# EAGLE board ATTiny84-RFM95W-BME280-panels-2020-03-05 (EAGLE 9.5.2)
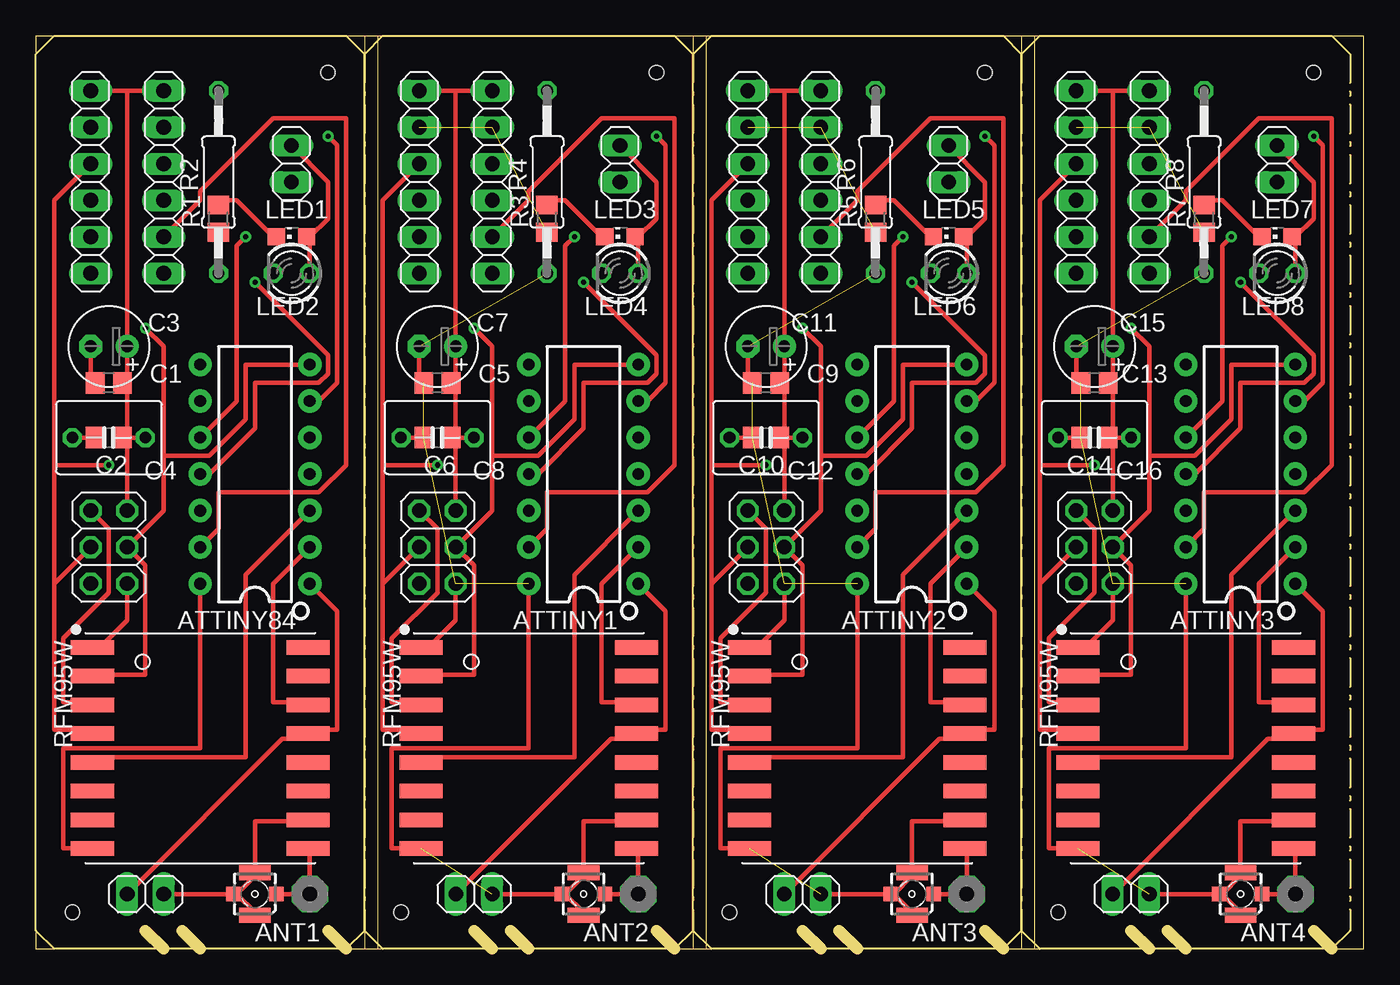
[diagram p0: board, top side]
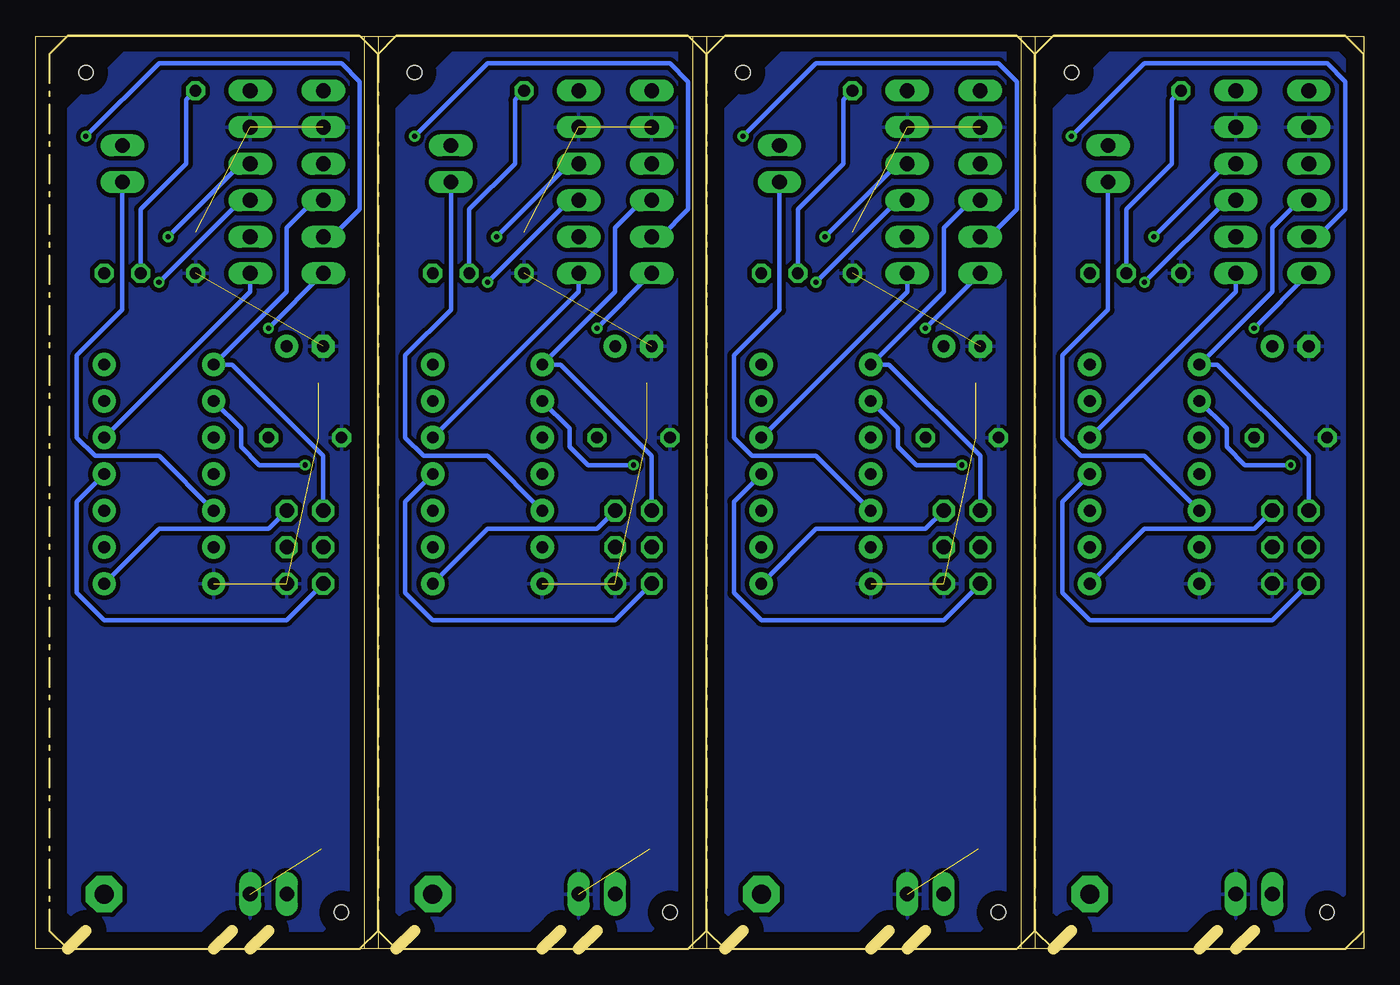
[diagram p1: board, bottom side, seen from below]

Size 92.38 x 63.5 mm. Coordinates in mm from the lower left corner, seen from the top.
Outline: 1.27,0 0,0 0,1.27
Outline: 1.27,0 8.89,0
Outline: 8.89,0 11.43,0
Outline: 11.43,0 21.59,0
Outline: 21.59,0 23.8,0 23.8,63.49 0,63.49 0,62.23
Outline: 7.62,1.27 8.89,0
Outline: 10.16,1.27 11.43,0
Outline: 20.32,1.27 21.59,0
Outline: 22.86,62.23 21.59,63.5 1.27,63.5 0,62.23
Outline: 22.86,62.23 22.86,1.27
Outline: 22.86,1.27 21.59,0
Outline: 21.59,0 1.27,0
Outline: 1.27,0 0,1.27
Outline: 0,1.27 0,62.23
Outline: 24.13,0 22.86,0 22.86,1.27
Outline: 24.13,0 31.75,0
Outline: 31.75,0 34.29,0
Outline: 34.29,0 44.45,0
Outline: 44.45,0 46.66,0 46.66,63.49 22.86,63.49 22.86,62.23
Outline: 30.48,1.27 31.75,0
Outline: 33.02,1.27 34.29,0
Outline: 43.18,1.27 44.45,0
Outline: 45.72,62.23 44.45,63.5 24.13,63.5 22.86,62.23
Outline: 45.72,62.23 45.72,1.27
Outline: 45.72,1.27 44.45,0
Outline: 44.45,0 24.13,0
Outline: 24.13,0 22.86,1.27
Outline: 22.86,1.27 22.86,62.23
Outline: 46.99,0 45.72,0 45.72,1.27
Outline: 46.99,0 54.61,0
Outline: 54.61,0 57.15,0
Outline: 57.15,0 67.31,0
Outline: 67.31,0 69.52,0 69.52,63.49 45.72,63.49 45.72,62.23
Outline: 53.34,1.27 54.61,0
Outline: 55.88,1.27 57.15,0
Outline: 66.04,1.27 67.31,0
Outline: 68.58,62.23 67.31,63.5 46.99,63.5 45.72,62.23
Outline: 68.58,62.23 68.58,1.27
Outline: 68.58,1.27 67.31,0
Outline: 67.31,0 46.99,0
Outline: 46.99,0 45.72,1.27
Outline: 45.72,1.27 45.72,62.23
Outline: 69.85,0 68.58,0 68.58,1.27
Outline: 69.85,0 77.47,0
Outline: 77.47,0 80.01,0
Outline: 80.01,0 90.17,0
Outline: 90.17,0 92.38,0 92.38,63.49 68.58,63.49 68.58,62.23
Outline: 76.2,1.27 77.47,0
Outline: 78.74,1.27 80.01,0
Outline: 88.9,1.27 90.17,0
Outline: 90.17,0 91.44,1.27 91.44,62.23 90.17,63.5 69.85,63.5 68.58,62.23
Outline: 90.17,0 69.85,0
Outline: 69.85,0 68.58,1.27
Outline: 68.58,1.27 68.58,62.23
Copper layers (1*16): Top 0.035mm / dielectric 1.5mm / Bottom 0.035mm
Design rules "default *": minimum track width 12mil, minimum drill 0.35mm, track to track 12mil, track to pad 12mil, pad to pad 12mil, via to via 12mil, smd to smd 6mil, copper to edge 40mil, drill to drill 6mil, minimum pad ring 10mil, minimum via ring 8mil, stop-mask expansion 4mil, vias tented up to drill 0mil, thermal gap 10mil
Holes 1 mm at 2.54,2.54 20.32,60.96 25.4,2.54 43.18,60.96 48.26,2.54 66.04,60.96 71.12,2.54 88.9,60.96

## Footprints (pad centres in the part's own frame; a part is rotated, then mirrored left to right if it is on the bottom)
PAD-01 = drill 1.321 pad 2.54 octagon: 1 0,0
DIP14 = drill 0.813 pad 1.626: 1 -7.62,-3.81; 2 -5.08,-3.81; 3 -2.54,-3.81; 4 0,-3.81; 5 2.54,-3.81; 6 5.08,-3.81; 7 7.62,-3.81; 8 7.62,3.81; 9 5.08,3.81; 10 2.54,3.81; 11 0,3.81; 12 -2.54,3.81; 13 -5.08,3.81; 14 -7.62,3.81
C0805 = smd 1.3 x 1.5: 1 -0.95,0; 2 0.95,0
E2,5-6 = drill 0.813 pad 1.6: + -1.27,0 | drill 0.813 pad 1.6 octagon: - 1.27,0
C050-050X075 = drill 0.813 octagon: 1 -2.54,0; 2 2.54,0
1X06 = drill 1.016 long: 1 -6.35,0; 2 -3.81,0; 3 -1.27,0; 4 1.27,0; 5 3.81,0; 6 6.35,0
1X02 = drill 1.016 long: 1 -1.27,0; 2 1.27,0
2X03 = drill 1.016 octagon: 1 -2.54,-1.27; 2 -2.54,1.27; 3 0,-1.27; 4 0,1.27; 5 2.54,-1.27; 6 2.54,1.27
CHIP-LED0805 = smd 1.2 x 1.2: A 0,-1.05; C 0,1.05
LED3MM = drill 0.813 octagon: A -1.27,0; K 1.27,0
R0805 = smd 1.3 x 1.5: 1 -0.95,0; 2 0.95,0
0207/12 = drill 0.813 octagon: 1 -6.35,0; 2 6.35,0
RFM95/96/97/98W = smd 3 x 1: 3.3V 7.5,1; !RESET -7.5,-3; ANT 7.5,-7; DIO0 7.5,3; DIO1 7.5,5; DIO2 7.5,7; DIO3 7.5,-3; DIO4 7.5,-1; DIO5 -7.5,-5; GND@1 -7.5,7; GND@2 -7.5,-7; GND@3 7.5,-5; MISO -7.5,5; MOSI -7.5,3; NSS -7.5,-1; SCK -7.5,1
734120110 = smd 1 x 1: 1 0,-1.5; S@1 0,1.5 | smd 1.05 x 2.2: S@2 -1.475,0; S@3 1.475,0

## Placement (x,y rotation side)
ANT1  [PAD-01]  19.05,3.81 0 top
ANT2  [PAD-01]  41.91,3.81 0 top
ANT3  [PAD-01]  64.77,3.81 0 top
ANT4  [PAD-01]  87.63,3.81 0 top
ATTINY1  ATTINY84ATTINY84-20PU  [DIP14]  38.1,33.02 90 top
ATTINY2  ATTINY84ATTINY84-20PU  [DIP14]  60.96,33.02 90 top
ATTINY3  ATTINY84ATTINY84-20PU  [DIP14]  83.82,33.02 90 top
ATTINY84  ATTINY84ATTINY84-20PU  [DIP14]  15.24,33.02 90 top
C1  100µF  [C0805]  5.08,39.37 180 top
C2  100nF  [C0805]  5.08,35.56 180 top
C3  100µF  [E2,5-6]  5.08,41.91 180 top
C4  100nF  [C050-050X075]  5.08,35.56 180 top
C5  100µF  [C0805]  27.94,39.37 180 top
C6  100nF  [C0805]  27.94,35.56 180 top
C7  100µF  [E2,5-6]  27.94,41.91 180 top
C8  100nF  [C050-050X075]  27.94,35.56 180 top
C9  100µF  [C0805]  50.8,39.37 180 top
C10  100nF  [C0805]  50.8,35.56 180 top
C11  100µF  [E2,5-6]  50.8,41.91 180 top
C12  100nF  [C050-050X075]  50.8,35.56 180 top
C13  100µF  [C0805]  73.66,39.37 180 top
C14  100nF  [C0805]  73.66,35.56 180 top
C15  100µF  [E2,5-6]  73.66,41.91 180 top
C16  100nF  [C050-050X075]  73.66,35.56 180 top
JP1  SPI  [1X06]  3.81,53.34 270 top
JP2  LED  [1X02]  17.78,54.61 270 top
JP3  GPIO  [1X06]  8.89,53.34 270 top
JP4  Power  [1X02]  7.62,3.81 0 top
JP5  ISP  [2X03]  5.08,27.94 270 top
JP6  SPI  [1X06]  26.67,53.34 270 top
JP7  LED  [1X02]  40.64,54.61 270 top
JP8  GPIO  [1X06]  31.75,53.34 270 top
JP9  Power  [1X02]  30.48,3.81 0 top
JP10  ISP  [2X03]  27.94,27.94 270 top
JP11  SPI  [1X06]  49.53,53.34 270 top
JP12  LED  [1X02]  63.5,54.61 270 top
JP13  GPIO  [1X06]  54.61,53.34 270 top
JP14  Power  [1X02]  53.34,3.81 0 top
JP15  ISP  [2X03]  50.8,27.94 270 top
JP16  SPI  [1X06]  72.39,53.34 270 top
JP17  LED  [1X02]  86.36,54.61 270 top
JP18  GPIO  [1X06]  77.47,53.34 270 top
JP19  Power  [1X02]  76.2,3.81 0 top
JP20  ISP  [2X03]  73.66,27.94 270 top
LED1  [CHIP-LED0805]  17.78,49.53 90 top
LED2  [LED3MM]  17.78,46.99 180 top
LED3  [CHIP-LED0805]  40.64,49.53 90 top
LED4  [LED3MM]  40.64,46.99 180 top
LED5  [CHIP-LED0805]  63.5,49.53 90 top
LED6  [LED3MM]  63.5,46.99 180 top
LED7  [CHIP-LED0805]  86.36,49.53 90 top
LED8  [LED3MM]  86.36,46.99 180 top
R1  470  [R0805]  12.7,50.8 90 top
R2  470  [0207/12]  12.7,53.34 90 top
R3  470  [R0805]  35.56,50.8 90 top
R4  470  [0207/12]  35.56,53.34 90 top
R5  470  [R0805]  58.42,50.8 90 top
R6  470  [0207/12]  58.42,53.34 90 top
R7  470  [R0805]  81.28,50.8 90 top
R8  470  [0207/12]  81.28,53.34 90 top
RFM95W  RFM95W  [RFM95/96/97/98W]  11.43,13.97 0 top
RFM95W1  RFM95W  [RFM95/96/97/98W]  34.29,13.97 0 top
RFM95W2  RFM95W  [RFM95/96/97/98W]  57.15,13.97 0 top
RFM95W3  RFM95W  [RFM95/96/97/98W]  80.01,13.97 0 top
X1  734120110  [734120110]  15.24,3.81 90 top
X2  734120110  [734120110]  38.1,3.81 90 top
X3  734120110  [734120110]  60.96,3.81 90 top
X4  734120110  [734120110]  83.82,3.81 90 top

## Library data of the parts
ANT1-ANT4 = discrete
ATTINY1-ATTINY3 ATTINY84 = SparkFun-IC-Microcontroller
C1-C16 = rcl; SPICEPREFIX: C
JP1-JP20 = pinhead
LED1-LED8 = led
R1-R8 = rcl; SPICEPREFIX: R
RFM95W RFM95W1-RFM95W3 = SparkFun-RF; PROD_ID: IC-13959; PROD_NAME: HopeRF RFM95W
X1-X4 = con-coax

## Nets
CSB: ATTINY84.6 JP1.5
CSB1: ATTINY1.6 JP6.5
CSB2: ATTINY2.6 JP11.5
CSB3: ATTINY3.6 JP16.5
CSH: ATTINY84.3 RFM95W.NSS
CSH1: ATTINY1.3 RFM95W1.NSS
CSH2: ATTINY2.3 RFM95W2.NSS
CSH3: ATTINY3.3 RFM95W3.NSS
DIO: ATTINY84.2 RFM95W.DIO0
DIO1: ATTINY1.2 RFM95W1.DIO0
DIO2: ATTINY2.2 RFM95W2.DIO0
DIO3: ATTINY3.2 RFM95W3.DIO0
GND: ATTINY84.14 C1.2 C2.2 C3.- C4.2 JP1.2 JP3.2 JP4.2 JP5.6 R1.1 R2.1 RFM95W.GND@1 RFM95W.GND@2 RFM95W.GND@3 X1.S@1 X1.S@2 X1.S@3
GND1: ATTINY1.14 C5.2 C6.2 C7.- C8.2 JP6.2 JP8.2 JP9.2 JP10.6 R3.1 R4.1 RFM95W1.GND@1 RFM95W1.GND@2 RFM95W1.GND@3 X2.S@1 X2.S@2 X2.S@3
GND2: ATTINY2.14 C9.2 C10.2 C11.- C12.2 JP11.2 JP13.2 JP14.2 JP15.6 R5.1 R6.1 RFM95W2.GND@1 RFM95W2.GND@2 RFM95W2.GND@3 X3.S@1 X3.S@2 X3.S@3
GND3: ATTINY3.14 C13.2 C14.2 C15.- C16.2 JP16.2 JP18.2 JP19.2 JP20.6 R7.1 R8.1 RFM95W3.GND@1 RFM95W3.GND@2 RFM95W3.GND@3 X4.S@1 X4.S@2 X4.S@3
LED: ATTINY84.12 JP2.2
LED1: ATTINY1.12 JP7.2
LED2: ATTINY2.12 JP12.2
LED3: ATTINY3.12 JP17.2
MISO: ATTINY84.7 JP1.6 JP5.4 RFM95W.MISO
MISO1: ATTINY1.7 JP6.6 JP10.4 RFM95W1.MISO
MISO2: ATTINY2.7 JP11.6 JP15.4 RFM95W2.MISO
MISO3: ATTINY3.7 JP16.6 JP20.4 RFM95W3.MISO
MOSI: ATTINY84.8 JP1.4 JP5.1 RFM95W.MOSI
MOSI1: ATTINY1.8 JP6.4 JP10.1 RFM95W1.MOSI
MOSI2: ATTINY2.8 JP11.4 JP15.1 RFM95W2.MOSI
MOSI3: ATTINY3.8 JP16.4 JP20.1 RFM95W3.MOSI
N$1: ANT1.1 RFM95W.ANT X1.1
N$2: ANT2.1 RFM95W1.ANT X2.1
N$3: LED1.C R1.2
N$4: LED2.K R2.2
N$5: LED3.C R3.2
N$6: LED4.K R4.2
N$7: JP2.1 LED1.A LED2.A
N$8: JP7.1 LED3.A LED4.A
N$9: ANT3.1 RFM95W2.ANT X3.1
N$10: LED5.C R5.2
N$11: LED6.K R6.2
N$12: JP12.1 LED5.A LED6.A
N$13: ANT4.1 RFM95W3.ANT X4.1
N$14: LED7.C R7.2
N$15: LED8.K R8.2
N$16: JP17.1 LED7.A LED8.A
PA0: ATTINY84.13 JP3.5
PA1: ATTINY1.11 JP8.4
PA2: ATTINY84.11 JP3.4
PA3: ATTINY1.13 JP8.5
PA4: ATTINY2.11 JP13.4
PA5: ATTINY2.13 JP13.5
PA6: ATTINY3.11 JP18.4
PA7: ATTINY3.13 JP18.5
PB1: ATTINY1.5 JP8.6
PB2: ATTINY84.5 JP3.6
PB3: ATTINY2.5 JP13.6
PB4: ATTINY3.5 JP18.6
RESET: ATTINY84.4 JP5.5
RESET1: ATTINY1.4 JP10.5
RESET2: ATTINY2.4 JP15.5
RESET3: ATTINY3.4 JP20.5
SCK: ATTINY84.9 JP1.3 JP5.3 RFM95W.SCK
SCK1: ATTINY1.9 JP6.3 JP10.3 RFM95W1.SCK
SCK2: ATTINY2.9 JP11.3 JP15.3 RFM95W2.SCK
SCK3: ATTINY3.9 JP16.3 JP20.3 RFM95W3.SCK
TX: ATTINY84.10 JP3.3
TX1: ATTINY1.10 JP8.3
TX2: ATTINY2.10 JP13.3
TX3: ATTINY3.10 JP18.3
VCC: ATTINY84.1 C1.1 C2.1 C3.+ C4.1 JP1.1 JP3.1 JP4.1 JP5.2 RFM95W.3.3V
VCC1: ATTINY1.1 C5.1 C6.1 C7.+ C8.1 JP6.1 JP8.1 JP9.1 JP10.2 RFM95W1.3.3V
VCC2: ATTINY2.1 C9.1 C10.1 C11.+ C12.1 JP11.1 JP13.1 JP14.1 JP15.2 RFM95W2.3.3V
VCC3: ATTINY3.1 C13.1 C14.1 C15.+ C16.1 JP16.1 JP18.1 JP19.1 JP20.2 RFM95W3.3.3V

## Tracks (layer width: path | path; a pad name or v marks a point on that pad's centre or on a via)
CSB  (via drill 0.35)
  Top 0.305: v20.32,56.52 20.95,55.88 20.95,39.37 19.68,38.1 ATTINY84.6
  Bottom 0.305: JP1.5 3.17,49.53 1.27,51.44 1.27,60.33 2.54,61.59 15.24,61.59 v20.32,56.52
CSB1  (via drill 0.35)
  Top 0.305: v43.18,56.52 43.81,55.88 43.81,39.37 42.55,38.1 ATTINY1.6
  Bottom 0.305: JP6.5 26.04,49.53 24.13,51.44 24.13,60.33 25.4,61.59 38.1,61.59 v43.18,56.52
CSB2  (via drill 0.35)
  Top 0.305: v66.04,56.52 66.67,55.88 66.67,39.37 65.41,38.1 ATTINY2.6
  Bottom 0.305: JP11.5 48.9,49.53 46.99,51.44 46.99,60.33 48.26,61.59 60.96,61.59 v66.04,56.52
CSB3  (via drill 0.35)
  Top 0.305: v88.9,56.52 89.53,55.88 89.53,39.37 88.27,38.1 ATTINY3.6
  Bottom 0.305: JP16.5 71.75,49.53 69.85,51.44 69.85,60.33 71.12,61.59 83.82,61.59 v88.9,56.52
CSH
  Top 0.305: ATTINY84.3 14.61,26.04 14.61,13.34 4.45,13.34 RFM95W.NSS
CSH1
  Top 0.305: ATTINY1.3 37.47,26.04 37.47,13.34 27.3,13.34 RFM95W1.NSS
CSH2
  Top 0.305: ATTINY2.3 60.33,26.04 60.33,13.34 50.16,13.34 RFM95W2.NSS
CSH3
  Top 0.305: ATTINY3.3 83.19,26.04 83.19,13.34 73.03,13.34 RFM95W3.NSS
DIO
  Top 0.305: ATTINY84.2 16.51,25.4 16.51,17.14 18.41,17.14 RFM95W.DIO0
DIO1
  Top 0.305: ATTINY1.2 39.37,25.4 39.37,17.14 41.27,17.14 RFM95W1.DIO0
DIO2
  Top 0.305: ATTINY2.2 62.23,25.4 62.23,17.14 64.14,17.14 RFM95W2.DIO0
DIO3
  Top 0.305: ATTINY3.2 85.09,25.4 85.09,17.14 87,17.14 RFM95W3.DIO0
GND
  Top 0.305: 13.97,3.81 15.24,5.08 X1.S@3 15.24,8.89 18.41,8.89 RFM95W.GND@3 | 13.97,3.81 15.24,2.54 X1.S@2 | 13.97,3.81 X1.S@1 JP4.2 | C4.2 C2.2 | C3.- 3.81,39.37 C1.2 | R2.1 R1.1 | ATTINY84.14 11.43,13.97 1.91,13.97 1.91,6.99 3.81,6.99 RFM95W.GND@2 | JP5.6 6.35,22.86 4.45,20.95 RFM95W.GND@1
  pour Bottom: 1.27,63.5 16.51,63.5 21.59,58.42 21.59,2.54 20.32,1.27 3.81,1.27 1.27,3.81
GND1  (7 unrouted)
  Top 0.305: 36.83,3.81 38.1,5.08 X2.S@3 38.1,8.89 41.27,8.89 RFM95W1.GND@3 | 36.83,3.81 38.1,2.54 X2.S@2 | 36.83,3.81 X2.S@1 JP9.2 | C8.2 C6.2 | C7.- 26.67,39.37 C5.2 | R4.1 R3.1 | ATTINY1.14 34.29,13.97 24.77,13.97 24.77,6.99 26.67,6.99 RFM95W1.GND@2 | JP10.6 29.21,22.86 27.3,20.95 RFM95W1.GND@1
  pour Bottom: 24.13,63.5 39.37,63.5 44.45,58.42 44.45,2.54 43.18,1.27 26.67,1.27 24.13,3.81
GND2  (7 unrouted)
  Top 0.305: 59.69,3.81 60.96,5.08 X3.S@3 60.96,8.89 64.14,8.89 RFM95W2.GND@3 | 59.69,3.81 60.96,2.54 X3.S@2 | 59.69,3.81 X3.S@1 JP14.2 | C12.2 C10.2 | C11.- 49.53,39.37 C9.2 | R6.1 R5.1 | ATTINY2.14 57.15,13.97 47.62,13.97 47.62,6.99 49.53,6.99 RFM95W2.GND@2 | JP15.6 52.07,22.86 50.16,20.95 RFM95W2.GND@1
  pour Bottom: 46.99,63.5 62.23,63.5 67.31,58.42 67.31,2.54 66.04,1.27 49.53,1.27 46.99,3.81
GND3  (7 unrouted)
  Top 0.305: 82.55,3.81 83.82,5.08 X4.S@3 83.82,8.89 87,8.89 RFM95W3.GND@3 | 82.55,3.81 83.82,2.54 X4.S@2 | 82.55,3.81 X4.S@1 JP19.2 | C16.2 C14.2 | C15.- 72.39,39.37 C13.2 | R8.1 R7.1 | ATTINY3.14 80.01,13.97 70.48,13.97 70.48,6.99 72.39,6.99 RFM95W3.GND@2 | JP20.6 74.93,22.86 73.03,20.95 RFM95W3.GND@1
  pour Bottom: 69.85,63.5 85.09,63.5 90.17,58.42 90.17,2.54 88.9,1.27 72.39,1.27 69.85,3.81
LED
  Bottom 0.305: JP2.2 17.78,44.45 20.95,41.27 20.95,35.56 19.68,34.29 15.24,34.29 ATTINY84.12
LED1
  Bottom 0.305: JP7.2 40.64,44.45 43.81,41.27 43.81,35.56 42.55,34.29 38.1,34.29 ATTINY1.12
LED2
  Bottom 0.305: JP12.2 63.5,44.45 66.67,41.27 66.67,35.56 65.41,34.29 60.96,34.29 ATTINY2.12
LED3
  Bottom 0.305: JP17.2 86.36,44.45 89.53,41.27 89.53,35.56 88.27,34.29 83.82,34.29 ATTINY3.12
MISO  (via drill 0.35)
  Top 0.305: RFM95W.MISO 4.45,19.05 7.62,19.05 7.62,26.67 JP5.4 8.89,30.48 8.89,34.29 | v7.62,43.18 8.89,41.91 8.89,34.29 | ATTINY84.7 14.61,40.64 14.61,36.83 12.06,34.29 8.89,34.29
  Bottom 0.305: v7.62,43.18 JP1.6
MISO1  (via drill 0.35)
  Top 0.305: RFM95W1.MISO 27.3,19.05 30.48,19.05 30.48,26.67 JP10.4 31.75,30.48 31.75,34.29 | v30.48,43.18 31.75,41.91 31.75,34.29 | ATTINY1.7 37.47,40.64 37.47,36.83 34.92,34.29 31.75,34.29
  Bottom 0.305: v30.48,43.18 JP6.6
MISO2  (via drill 0.35)
  Top 0.305: RFM95W2.MISO 50.16,19.05 53.34,19.05 53.34,26.67 JP15.4 54.61,30.48 54.61,34.29 | v53.34,43.18 54.61,41.91 54.61,34.29 | ATTINY2.7 60.33,40.64 60.33,36.83 57.78,34.29 54.61,34.29
  Bottom 0.305: v53.34,43.18 JP11.6
MISO3  (via drill 0.35)
  Top 0.305: RFM95W3.MISO 73.03,19.05 76.2,19.05 76.2,26.67 JP20.4 77.47,30.48 77.47,34.29 | v76.2,43.18 77.47,41.91 77.47,34.29 | ATTINY3.7 83.19,40.64 83.19,36.83 80.64,34.29 77.47,34.29
  Bottom 0.305: v76.2,43.18 JP16.6
MOSI
  Top 0.305: JP5.1 5.08,29.21 5.08,24.77 1.91,21.59 1.91,17.14 3.81,17.14 RFM95W.MOSI
  Bottom 0.305: JP1.4 4.45,52.07 6.35,50.16 6.35,45.72 ATTINY84.8 10.16,40.64 3.81,34.29 JP5.1
MOSI1
  Top 0.305: JP10.1 27.94,29.21 27.94,24.77 24.77,21.59 24.77,17.14 26.67,17.14 RFM95W1.MOSI
  Bottom 0.305: JP6.4 27.3,52.07 29.21,50.16 29.21,45.72 ATTINY1.8 33.02,40.64 26.67,34.29 JP10.1
MOSI2
  Top 0.305: JP15.1 50.8,29.21 50.8,24.77 47.62,21.59 47.62,17.14 49.53,17.14 RFM95W2.MOSI
  Bottom 0.305: JP11.4 50.16,52.07 52.07,50.16 52.07,45.72 ATTINY2.8 55.88,40.64 49.53,34.29 JP15.1
MOSI3
  Top 0.305: JP20.1 73.66,29.21 73.66,24.77 70.48,21.59 70.48,17.14 72.39,17.14 RFM95W3.MOSI
  Bottom 0.305: JP16.4 73.03,52.07 74.93,50.16 74.93,45.72 ATTINY3.8 78.74,40.64 72.39,34.29 JP20.1
N$1
  Top 0.305: X1.1 ANT1.1 19.05,6.99 RFM95W.ANT
N$2
  Top 0.305: X2.1 ANT2.1 41.91,6.99 RFM95W1.ANT
N$3
  Top 0.305: LED1.C 16.51,49.53 13.97,52.07 12.7,52.07 R1.2
N$4
  Bottom 0.305: LED2.K 16.51,51.44 13.34,54.61 13.34,59.05 R2.2
N$5
  Top 0.305: LED3.C 39.37,49.53 36.83,52.07 35.56,52.07 R3.2
N$6
  Bottom 0.305: LED4.K 39.37,51.44 36.2,54.61 36.2,59.05 R4.2
N$7
  Top 0.305: LED2.A 19.05,49.53 | JP2.1 20.32,53.34 20.32,50.8 19.05,49.53 | 19.05,49.53 LED1.A
N$8
  Top 0.305: LED4.A 41.91,49.53 | JP7.1 43.18,53.34 43.18,50.8 41.91,49.53 | 41.91,49.53 LED3.A
N$9
  Top 0.305: X3.1 ANT3.1 64.77,6.99 RFM95W2.ANT
N$10
  Top 0.305: LED5.C 62.23,49.53 59.69,52.07 58.42,52.07 R5.2
N$11
  Bottom 0.305: LED6.K 62.23,51.44 59.05,54.61 59.05,59.05 R6.2
N$12
  Top 0.305: LED6.A 64.77,49.53 | JP12.1 66.04,53.34 66.04,50.8 64.77,49.53 | 64.77,49.53 LED5.A
N$13
  Top 0.305: X4.1 ANT4.1 87.63,6.99 RFM95W3.ANT
N$14
  Top 0.305: LED7.C 85.09,49.53 82.55,52.07 81.28,52.07 R7.2
N$15
  Bottom 0.305: LED8.K 85.09,51.44 81.92,54.61 81.92,59.05 R8.2
N$16
  Top 0.305: LED8.A 87.63,49.53 | JP17.1 88.9,53.34 88.9,50.8 87.63,49.53 | 87.63,49.53 LED7.A
PA0
  Top 0.305: JP3.5 11.43,52.07 11.43,52.7 16.51,57.78 21.59,57.78 21.59,33.66 19.68,31.75 12.7,31.75 12.7,29.21 ATTINY84.13
PA1  (via drill 0.35)
  Top 0.305: v38.1,46.35 43.18,41.27 43.18,40.01 42.55,39.37 38.1,39.37 38.1,36.2 34.92,33.02 ATTINY1.11
  Bottom 0.305: JP8.4 32.38,52.07 v38.1,46.35
PA2  (via drill 0.35)
  Top 0.305: v15.24,46.35 20.32,41.27 20.32,40.01 19.68,39.37 15.24,39.37 15.24,36.2 12.06,33.02 ATTINY84.11
  Bottom 0.305: JP3.4 9.53,52.07 v15.24,46.35
PA3
  Top 0.305: JP8.5 34.29,52.07 34.29,52.7 39.37,57.78 44.45,57.78 44.45,33.66 42.55,31.75 35.56,31.75 35.56,29.21 ATTINY1.13
PA4  (via drill 0.35)
  Top 0.305: v60.96,46.35 66.04,41.27 66.04,40.01 65.41,39.37 60.96,39.37 60.96,36.2 57.78,33.02 ATTINY2.11
  Bottom 0.305: JP13.4 55.24,52.07 v60.96,46.35
PA5
  Top 0.305: JP13.5 57.15,52.07 57.15,52.7 62.23,57.78 67.31,57.78 67.31,33.66 65.41,31.75 58.42,31.75 58.42,29.21 ATTINY2.13
PA6  (via drill 0.35)
  Top 0.305: v83.82,46.35 88.9,41.27 88.9,40.01 88.27,39.37 83.82,39.37 83.82,36.2 80.64,33.02 ATTINY3.11
  Bottom 0.305: JP18.4 78.11,52.07 v83.82,46.35
PA7
  Top 0.305: JP18.5 80.01,52.07 80.01,52.7 85.09,57.78 90.17,57.78 90.17,33.66 88.27,31.75 81.28,31.75 81.28,29.21 ATTINY3.13
PB1
  Bottom 0.305: JP8.6 31.75,45.72 ATTINY1.5
PB2
  Bottom 0.305: JP3.6 8.89,45.72 ATTINY84.5
PB3
  Bottom 0.305: JP13.6 54.61,45.72 ATTINY2.5
PB4
  Bottom 0.305: JP18.6 77.47,45.72 ATTINY3.5
RESET
  Bottom 0.305: JP5.5 6.35,22.86 19.05,22.86 20.95,24.77 20.95,31.11 ATTINY84.4
RESET1
  Bottom 0.305: JP10.5 29.21,22.86 41.91,22.86 43.81,24.77 43.81,31.11 ATTINY1.4
RESET2
  Bottom 0.305: JP15.5 52.07,22.86 64.77,22.86 66.67,24.77 66.67,31.11 ATTINY2.4
RESET3
  Bottom 0.305: JP20.5 74.93,22.86 87.63,22.86 89.53,24.77 89.53,31.11 ATTINY3.4
SCK  (via drill 0.35)
  Top 0.305: 1.27,25.4 1.27,15.24 3.81,15.24 RFM95W.SCK | JP5.3 1.27,25.4 | JP1.3 1.27,52.07 1.27,33.66 | 1.27,25.4 1.27,33.66 | 1.27,33.66 v5.08,33.66
  Bottom 0.305: ATTINY84.9 9.53,36.2 9.53,34.92 8.26,33.66 v5.08,33.66
SCK1  (via drill 0.35)
  Top 0.305: 24.13,25.4 24.13,15.24 26.67,15.24 RFM95W1.SCK | JP10.3 24.13,25.4 | JP6.3 24.13,52.07 24.13,33.66 | 24.13,25.4 24.13,33.66 | 24.13,33.66 v27.94,33.66
  Bottom 0.305: ATTINY1.9 32.38,36.2 32.38,34.92 31.11,33.66 v27.94,33.66
SCK2  (via drill 0.35)
  Top 0.305: 46.99,25.4 46.99,15.24 49.53,15.24 RFM95W2.SCK | JP15.3 46.99,25.4 | JP11.3 46.99,52.07 46.99,33.66 | 46.99,25.4 46.99,33.66 | 46.99,33.66 v50.8,33.66
  Bottom 0.305: ATTINY2.9 55.24,36.2 55.24,34.92 53.98,33.66 v50.8,33.66
SCK3  (via drill 0.35)
  Top 0.305: 69.85,25.4 69.85,15.24 72.39,15.24 RFM95W3.SCK | JP20.3 69.85,25.4 | JP16.3 69.85,52.07 69.85,33.66 | 69.85,25.4 69.85,33.66 | 69.85,33.66 v73.66,33.66
  Bottom 0.305: ATTINY3.9 78.11,36.2 78.11,34.92 76.83,33.66 v73.66,33.66
TX  (via drill 0.35)
  Top 0.305: v14.61,49.53 13.97,48.9 13.97,38.1 ATTINY84.10
  Bottom 0.305: JP3.3 9.53,54.61 v14.61,49.53
TX1  (via drill 0.35)
  Top 0.305: v37.47,49.53 36.83,48.9 36.83,38.1 ATTINY1.10
  Bottom 0.305: JP8.3 32.38,54.61 v37.47,49.53
TX2  (via drill 0.35)
  Top 0.305: v60.33,49.53 59.69,48.9 59.69,38.1 ATTINY2.10
  Bottom 0.305: JP13.3 55.24,54.61 v60.33,49.53
TX3  (via drill 0.35)
  Top 0.305: v83.19,49.53 82.55,48.9 82.55,38.1 ATTINY3.10
  Bottom 0.305: JP18.3 78.11,54.61 v83.19,49.53
VCC
  Top 0.305: JP3.1 6.35,59.69 | 6.35,59.69 JP1.1 | C4.1 6.35,35.56 | 6.35,39.37 C3.+ 6.35,59.69 | 6.35,39.37 6.35,35.56 | 6.35,39.37 C1.1 | 6.35,35.56 JP5.2 | 6.35,35.56 C2.1 | ATTINY84.1 20.95,23.5 20.95,15.24 19.05,15.24 RFM95W.3.3V 18.41,14.61 17.14,14.61 JP4.1
  Bottom 0.305: JP5.2 7.62,29.21 15.24,29.21 ATTINY84.1
VCC1
  Top 0.305: JP8.1 29.21,59.69 | 29.21,59.69 JP6.1 | C8.1 29.21,35.56 | 29.21,39.37 C7.+ 29.21,59.69 | 29.21,39.37 29.21,35.56 | 29.21,39.37 C5.1 | 29.21,35.56 JP10.2 | 29.21,35.56 C6.1 | ATTINY1.1 43.81,23.5 43.81,15.24 41.91,15.24 RFM95W1.3.3V 41.27,14.61 40.01,14.61 JP9.1
  Bottom 0.305: JP10.2 30.48,29.21 38.1,29.21 ATTINY1.1
VCC2
  Top 0.305: JP13.1 52.07,59.69 | 52.07,59.69 JP11.1 | C12.1 52.07,35.56 | 52.07,39.37 C11.+ 52.07,59.69 | 52.07,39.37 52.07,35.56 | 52.07,39.37 C9.1 | 52.07,35.56 JP15.2 | 52.07,35.56 C10.1 | ATTINY2.1 66.67,23.5 66.67,15.24 64.77,15.24 RFM95W2.3.3V 64.14,14.61 62.87,14.61 JP14.1
  Bottom 0.305: JP15.2 53.34,29.21 60.96,29.21 ATTINY2.1
VCC3
  Top 0.305: JP18.1 74.93,59.69 | 74.93,59.69 JP16.1 | C16.1 74.93,35.56 | 74.93,39.37 C15.+ 74.93,59.69 | 74.93,39.37 74.93,35.56 | 74.93,39.37 C13.1 | 74.93,35.56 JP20.2 | 74.93,35.56 C14.1 | ATTINY3.1 89.53,23.5 89.53,15.24 87.63,15.24 RFM95W3.3.3V 87,14.61 85.72,14.61 JP19.1
  Bottom 0.305: JP20.2 76.2,29.21 83.82,29.21 ATTINY3.1

## Text on the board
tNames: RFM95W | RFM95W | RFM95W | RFM95W
tValues: ° | ° | ° | ° | ° | ° | ° | ° | MISO CSB MOSI SCK GND VCC | PB2 PA0 PA2 TX GND VCC | MISO CSB MOSI SCK GND VCC | PB2 PA0 PA2 TX GND VCC | MISO CSB MOSI SCK GND VCC | PB2 PA0 PA2 TX GND VCC | MISO CSB MOSI SCK GND VCC | PB2 PA0 PA2 TX GND VCC | ° | ° | ° | ° | MI Vcc / / CL MO / / Rst Gd | MI Vcc / / CL MO / / Rst Gd | MI Vcc / / CL MO / / Rst Gd | MI Vcc / / CL MO / / Rst Gd | (c) Joachim Banzhaf 2020, 1.8-3.6V, <10µA sleep, <100mA tx | (c) Joachim Banzhaf 2020, 1.8-3.6V, <10µA sleep, <100mA tx | (c) Joachim Banzhaf 2020, 1.8-3.6V, <10µA sleep, <100mA tx | (c) Joachim Banzhaf 2020, 1.8-3.6V, <10µA sleep, <100mA tx | 3V3 | Gnd | 3V3 | Gnd | 3V3 | Gnd | 3V3 | Gnd